# EAGLE board smartwatch-bottom (EAGLE 9.5.1)

Size 33 x 33 mm. Coordinates in mm from the lower left corner, seen from the top.
Outline: 0,0 33,0 33,33 0,33 0,0
Copper layers (1*16): Top 0.035mm / dielectric 1.5mm / Bottom 0.035mm
Design rules "default": minimum track width 6mil, minimum drill 0.35mm, track to track 6mil, track to pad 6mil, pad to pad 6mil, via to via 6mil, smd to smd 6mil, copper to edge 40mil, drill to drill 6mil, minimum pad ring 10mil, minimum via ring 8mil, stop-mask expansion 4mil, vias tented up to drill 0mil, thermal gap 10mil

## Footprints (pad centres in the part's own frame; a part is rotated, then mirrored left to right if it is on the bottom)
C0603 = smd 1.1 x 1: 1 -0.85,0; 2 0.85,0
LSM6DS3_CAST = smd 0.635 x 1.27: 1 -2.54,1.27; 2 -2.54,-1.27; 3 2.54,-1.27; 4 2.54,1.27
SOT23-5 = smd 0.6 x 1.2: 1 -0.95,-1.306; 2 0,-1.306; 3 0.95,-1.306; 4 0.95,1.306; 5 -0.95,1.306
SO14 = smd 0.6 x 2.2: 1 -3.81,-2.6; 2 -2.54,-2.6; 3 -1.27,-2.6; 4 0,-2.6; 5 1.27,-2.6; 6 2.54,-2.6; 7 3.81,-2.6; 8 3.81,2.6; 9 2.54,2.6; 10 1.27,2.6; 11 0,2.6; 12 -1.27,2.6; 13 -2.54,2.6; 14 -3.81,2.6
SOT23-3 = smd 0.8 x 0.9: 1 -0.95,-1; 2 0.95,-1; 3 0,1.1
R0603 = smd 1 x 1.1: 1 -0.85,0; 2 0.85,0
R0402 = smd 0.7 x 0.9: 1 -0.65,0; 2 0.65,0
SO16 = smd 0.66 x 2.032: 1 -4.445,-3.073; 2 -3.175,-3.073; 3 -1.905,-3.073; 4 -0.635,-3.073; 5 0.635,-3.073; 6 1.905,-3.073; 7 3.175,-3.073; 8 4.445,-3.073; 9 4.445,3.073; 10 3.175,3.073; 11 1.905,3.073; 12 0.635,3.073; 13 -0.635,3.073; 14 -1.905,3.073; 15 -3.175,3.073; 16 -4.445,3.073
PPG.MODULE.2 = drill 0.508 pad 0.94: GND 1.27,5.08; LD1 0,5.08; LD2 0.635,-5.08; PD -1.27,5.08; V+ -0.635,-5.08
SOT-23-8 = smd 0.35 x 0.6: 1 -0.991,-1.176; 2 -0.341,-1.176; 3 0.309,-1.176; 4 0.959,-1.176; 5 0.959,1.176; 6 0.309,1.176; 7 -0.341,1.176; 8 -0.991,1.176

## Placement (x,y rotation side)
C1  2.2n  [C0603]  16.55,17.82 0 top
C2  22u  [C0603]  10.2,21.63 0 top
C3  100n  [C0603]  7.66,10.2 0 top
C4  100n  [C0603]  2.58,10.2 0 top
C5  22n  [C0603]  6.39,21.63 0 top
C6  100n  [C0603]  26.71,15.28 0 top
C7  2.2n  [C0603]  11.47,17.82 0 top
C8  2.2u  [C0603]  6.39,19.09 0 top
C9  2.2u  [C0603]  2.58,17.82 0 top
C11  100n  [C0603]  2.88,5.15 270 top
C12  100n  [C0603]  20.36,15.28 0 top
C13  100n  [C0603]  14.01,15.28 0 top
IMU1  LSM6DS3_CAST  [LSM6DS3_CAST]  7.58,5.4 0 top
OP1  [SOT23-5]  11.47,27.98 0 top
OP2  [SO14]  26.71,25.44 270 top
Q2  [SOT23-3]  2.58,25.44 0 top
R1  220k  [R0603]  7.66,15.28 0 top
R2  1M  [R0603]  19.09,27.98 0 top
R3  220k  [R0603]  2.58,14.01 0 top
R4  10M  [R0603]  20.36,25.44 0 top
R5  220k  [R0603]  25.44,17.82 0 top
R6  220k  [R0603]  21.63,17.82 0 top
R7  10M  [R0603]  19.09,22.9 0 top
R8  1M  [R0603]  15.28,27.98 0 top
R9  [R0603]  6.39,25.44 0 top
R10  10k  [R0402]  2.58,20.36 0 top
R11  10k  [R0402]  20.36,30.52 0 top
R12  10k  [R0603]  14.01,22.9 0 top
U2  AD5242-SO16  [SO16]  26.71,6.39 270 top
U$1  [PPG.MODULE.2]  16.5,16.5 0 top
U$2  AD5171  [SOT-23-8]  12.74,10.2 0 top

## Library data of the parts
C1-C9 C11-C13 R1-R12 = LinnesLab-Passives
IMU1 = LinnesLab-Sensors
OP1 OP2 = LinnesLab-AnalogIC
Q2 = LinnesLab-DiscreteSemi
U2 U$2 = LinnesLab-DigitalIC
U$1 = LinnesLab-Connectors

## Nets
3.3V: C4.2 C6.2 C11.2 C12.2 C13.2 IMU1.2 OP1.5 OP2.4 R3.2 R5.2 R10.2 U2.5 U2.6 U$1.V+ U$2.2 U$2.6
G.A1: U2.2
G.A2: U2.16
G.O1: U2.1
G.O2: U2.13
G.W2: C5.1 OP2.2 R12.1 U2.15
GND: C4.1 C6.1 C11.1 C12.1 C13.1 IMU1.1 OP1.2 OP1.3 OP2.11 Q2.2 R1.1 R6.1 R11.1 U2.9 U2.10 U2.11 U2.12 U$1.GND U$2.3
LED: Q2.3
LED.C: U$1.LD1
LED.CTRL: U$2.8
N$1: C8.2 OP2.5 R1.2 R3.1
N$2: C9.2 OP2.10 R5.1 R6.2
N$3: C7.2 OP2.6 R2.2 R4.1
N$4: C7.1 C9.1 OP2.7 R4.2
N$5: C1.2 OP2.9 R7.1 R8.2
N$6: C1.1 C2.1 OP2.8 R7.2
N$7: C2.2 R12.2
N$11: Q2.1 R9.2
N$12: R9.1 U$2.1 U$2.7
N$14: OP2.12 R10.1 R11.2
PD.C: C3.1 OP1.4 U2.4 U$1.PD
PPG: C5.2 OP2.1 U2.14
SCL: IMU1.3 U2.7 U$2.4
SDA: IMU1.4 U2.8 U$2.5
TIA: C3.2 C8.1 OP1.1 U2.3
VREF: OP2.3 OP2.13 OP2.14 R2.1 R8.1

## Tracks (layer width: path | path; a pad name or v marks a point on that pad's centre or on a via)
3.3V  (15 unrouted)
G.W2  (3 unrouted)
GND  (18 unrouted)
N$1  (3 unrouted)
N$2  (3 unrouted)
N$3  (3 unrouted)
N$4  (3 unrouted)
N$5  (3 unrouted)
N$6  (3 unrouted)
N$7  (1 unrouted)
N$11  (1 unrouted)
N$12  (2 unrouted)
N$14  (2 unrouted)
PD.C  (3 unrouted)
PPG  (2 unrouted)
SCL  (2 unrouted)
SDA  (2 unrouted)
TIA  (3 unrouted)
VREF  (4 unrouted)